# Altium PCB ADCBoard.PcbDoc (part 2 of 2)
Units mm, origin at the board's own origin, x right, y up, seen from the top; angles counter-clockwise.
Board outline 160 x 100 mm, 2 copper layers (Top Layer, Bottom Layer); 387 components, 428 nets, 1579 pads, 0 vias.
Unrouted connection lines stored in the file: 1110.
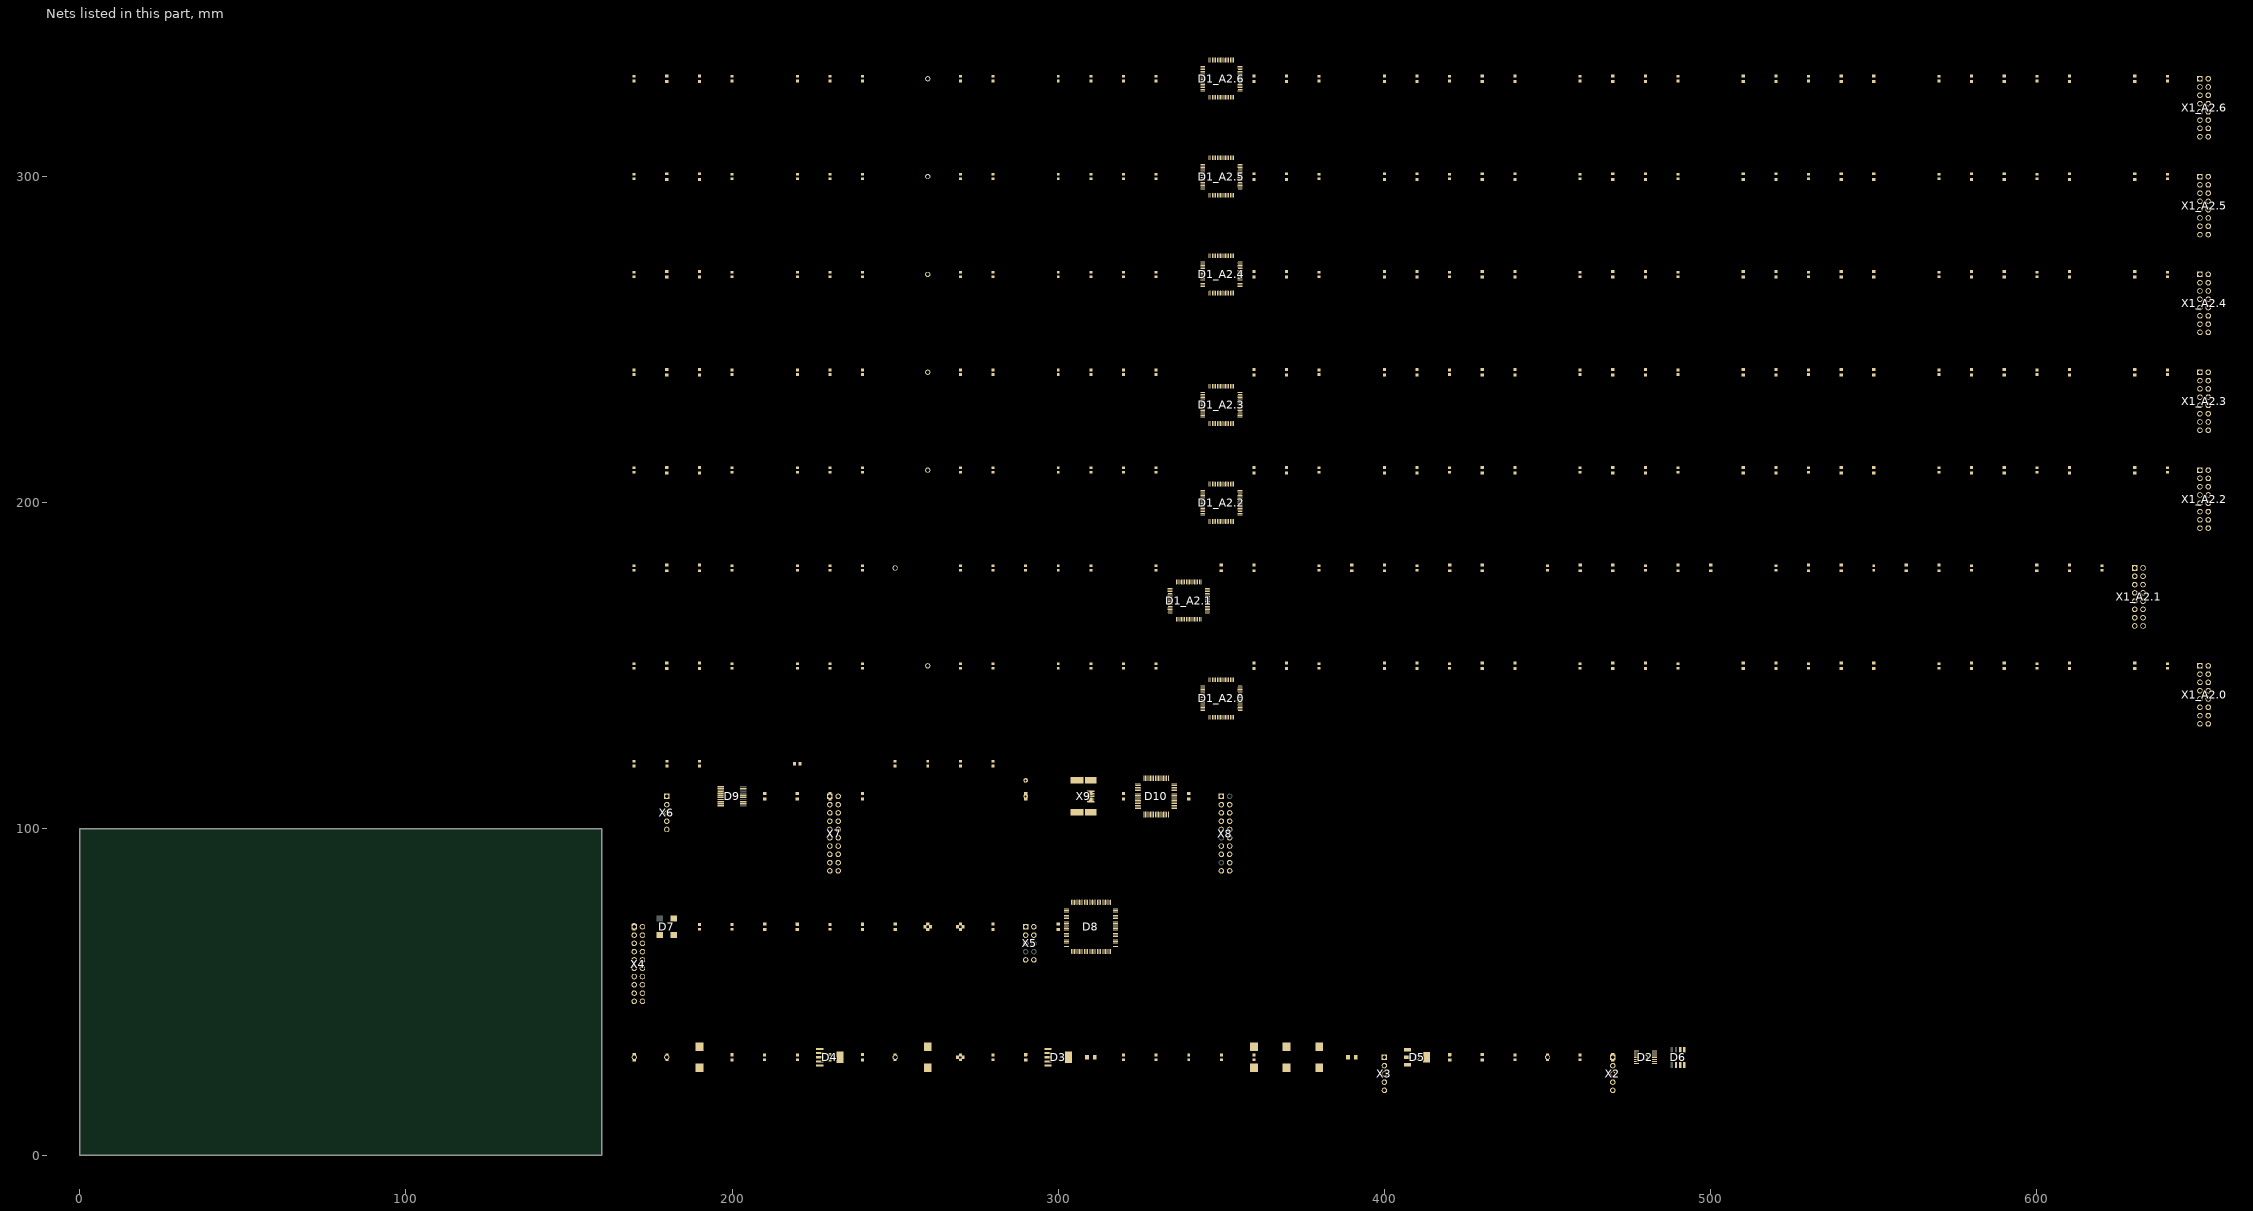
[diagram p2: the nets of this part, all layers, seen from the top]

## Part data
C1_A2.0 C1_A2.1 C1_A2.2 C1_A2.3 C1_A2.4 C1_A2.5 C1_A2.6 C2_A2.0 C2_A2.1 C2_A2.2 C2_A2.3 C2_A2.4 C2_A2.5 C2_A2.6 C3_A2.0 C3_A2.1 C3_A2.2 C3_A2.3 C3_A2.4 C3_A2.5 C3_A2.6 C4_A2.0 C4_A2.1 C4_A2.2 C4_A2.3 C4_A2.4 C4_A2.5 C4_A2.6 C5_A2.0 C5_A2.1 C5_A2.2 C5_A2.3 C5_A2.4 C5_A2.5 C5_A2.6 C6_A2.0 C6_A2.1 C6_A2.2 C6_A2.3 C6_A2.4 C6_A2.5 C6_A2.6 C7_A2.0 C7_A2.1 C7_A2.2 C7_A2.3 C7_A2.4 C7_A2.5 C7_A2.6 C8_A2.0 C8_A2.1 C8_A2.2 C8_A2.3 C8_A2.4 C8_A2.5 C8_A2.6 C9_A2.0 C9_A2.1 C9_A2.2 C9_A2.3 C9_A2.4 C9_A2.5 C9_A2.6 C10_A2.0 C10_A2.1 C10_A2.2 C10_A2.3 C10_A2.4 C10_A2.5 C10_A2.6 C11_A2.0 C11_A2.1 C11_A2.2 C11_A2.3 C11_A2.4 C11_A2.5 C11_A2.6 C12_A2.0 C12_A2.1 C12_A2.2 C12_A2.3 C12_A2.4 C12_A2.5 C12_A2.6 C13_A2.0 C13_A2.1 C13_A2.2 C13_A2.3 C13_A2.4 C13_A2.5 C13_A2.6 C14_A2.0 C14_A2.1 C14_A2.2 C14_A2.3 C14_A2.4 C14_A2.5 C14_A2.6 C15_A2.0 C15_A2.1 C15_A2.2 C15_A2.3 C15_A2.4 C15_A2.5 C15_A2.6 C16_A2.0 C16_A2.1 C16_A2.2 C16_A2.3 C16_A2.4 C16_A2.5 C16_A2.6 C17_A2.0 C17_A2.1 C17_A2.2 C17_A2.3 C17_A2.4 C17_A2.5 C17_A2.6 C18_A2.0 C18_A2.1 C18_A2.2 C18_A2.3 C18_A2.4 C18_A2.5 C18_A2.6 C19_A2.0 C19_A2.1 C19_A2.2 C19_A2.3 C19_A2.4 C19_A2.5 C19_A2.6 C23 C24 C25 C26 C27 C28 C29 C30 C31 C32 C33 C34 C35 C36 C38 C39 C42 C43 C44 C45 C46 C47 C48 C49 C50 C51 C52 C53 C54 C55 C56 C57 C58 C59 C60 C61 C62 C63 C64 C65 C66 C67 C68 C69: library part CC0603, "±10%, X7R, 0603"
C20 C21 C22 C37 C40 C41: library part "CAP TANTAL CASE E"
D1_A2.0 D1_A2.1 D1_A2.2 D1_A2.3 D1_A2.4 D1_A2.5 D1_A2.6: "AD7607BSTZ ADC Simultan"
D2: "SN74LV4T125PWR voltage level converter"
D5: "5V LDO"
D8: "MAX V 1.8V CPLD, 74 IOs, 570 Logic Elements, 100-Pin TQFP, Industrial Temperature, Speed Grade 5"
D9: "RS232 driver"
D10: "STM32F103RF LQFP64"
FB1 FB2 FB3: library part BLM21
Q1: "Ceramic quarz"
R1_A2.0 R1_A2.1 R1_A2.2 R1_A2.3 R1_A2.4 R1_A2.5 R1_A2.6 R2_A2.0 R2_A2.1 R2_A2.2 R2_A2.3 R2_A2.4 R2_A2.5 R2_A2.6 R3_A2.0 R3_A2.1 R3_A2.2 R3_A2.3 R3_A2.4 R3_A2.5 R3_A2.6 R4_A2.0 R4_A2.1 R4_A2.2 R4_A2.3 R4_A2.4 R4_A2.5 R4_A2.6 R5_A2.0 R5_A2.1 R5_A2.2 R5_A2.3 R5_A2.4 R5_A2.5 R5_A2.6 R6_A2.0 R6_A2.1 R6_A2.2 R6_A2.3 R6_A2.4 R6_A2.5 R6_A2.6 R7_A2.0 R7_A2.1 R7_A2.2 R7_A2.3 R7_A2.4 R7_A2.5 R7_A2.6 R8_A2.0 R8_A2.1 R8_A2.2 R8_A2.3 R8_A2.4 R8_A2.5 R8_A2.6 R9_A2.0 R9_A2.1 R9_A2.2 R9_A2.3 R9_A2.4 R9_A2.5 R9_A2.6 R10_A2.0 R10_A2.1 R10_A2.2 R10_A2.3 R10_A2.4 R10_A2.5 R10_A2.6 R11_A2.0 R11_A2.1 R11_A2.2 R11_A2.3 R11_A2.4 R11_A2.5 R11_A2.6 R12_A2.0 R12_A2.1 R12_A2.2 R12_A2.3 R12_A2.4 R12_A2.5 R12_A2.6 R13_A2.0 R13_A2.1 R13_A2.2 R13_A2.3 R13_A2.4 R13_A2.5 R13_A2.6 R14_A2.0 R14_A2.1 R14_A2.2 R14_A2.3 R14_A2.4 R14_A2.5 R14_A2.6 R15_A2.0 R15_A2.1 R15_A2.2 R15_A2.3 R15_A2.4 R15_A2.5 R15_A2.6 R16_A2.0 R16_A2.1 R16_A2.2 R16_A2.3 R16_A2.4 R16_A2.5 R16_A2.6 R17_A2.0 R17_A2.1 R17_A2.2 R17_A2.3 R17_A2.4 R17_A2.5 R17_A2.6 R18_A2.0 R18_A2.1 R18_A2.2 R18_A2.3 R18_A2.4 R18_A2.5 R18_A2.6 R19 R20 R21 R22 R23 R24 R25 R26 R27 R28 R29 R30 R31 R32 R33 R34 R35 R36 R37 R38 R39 R40 R41 R42 R43 R44: library part RES0603, "±5%, 0603"
X1_A2.0 X1_A2.1 X1_A2.2 X1_A2.3 X1_A2.4 X1_A2.5 X1_A2.6: library part ADCIN, "ADC connector"
X2: library part SYNCIN
X3: library part PWRIN
X4 X7: library part ADCOUT, "ADCOUT connector"
X5: library part BYTEBLASTER
X6: library part RS232
X8: library part JTAG
X9: library part USB-MINI-B

## Nets (pads, with @x,y where several pads share a name; then routed paths per layer and width w, separated by ;. In a path a pad name is that pad's centre, name@x,y a point inside that pad or via, vN(x,y) a via of type N, cw(c..) or ccw(c..) an arc to the next point about the centre after c; other vN are vias at no path point)
+1.8V: C21.1 C25.1 C30.1 C33.2 C50.2 C52.2 C54.2 C56.2 D3.4 D8.13 D8.39 D8.63 D8.88 R21.2 TP2.1
+3.3V: C10_A2.0.2 C10_A2.1.2 C10_A2.2.2 C10_A2.3.2 C10_A2.4.2 C10_A2.5.2 C10_A2.6.2 C22.1 C27.1 C28.2 C32.1 C34.2 C49.2 C51.2 C53.2 C55.2 C57.2 C63.2 C64.2 C66.2 C68.2 C69.2 D1_A2.0.23 D1_A2.1.23 D1_A2.2.23 D1_A2.3.23 D1_A2.4.23 D1_A2.5.23 D1_A2.6.23 D2.14 D4.4 D7.4 D8.9 D8.31 D8.45 D8.59 D8.80 D8.94 D9.19 D10.1 D10.13 D10.19 D10.32 D10.48 D10.64 R10_A2.0.1 R10_A2.1.1 R10_A2.2.1 R10_A2.3.1 R10_A2.4.1 R10_A2.5.1 R10_A2.6.1 R24.2 R31.2 R35.2 R36.2 R39.2 R41.1 R42.2 TP3.1 X4.19 X5.4 X7.19 X8.1
+5V: C24.2 C26.2 C29.2 C31.2 C38.2 C39.2 C40.1 D3.2 D4.2 D5.3 FB2.1 R20.2 R23.2 X3.3 X8.19
+5VA: C1_A2.0.2 C1_A2.1.2 C1_A2.2.2 C1_A2.3.2 C1_A2.4.2 C1_A2.5.2 C1_A2.6.2 C11_A2.0.2 C11_A2.1.2 C11_A2.2.2 C11_A2.3.2 C11_A2.4.2 C11_A2.5.2 C11_A2.6.2 C18_A2.0.1 C18_A2.1.1 C18_A2.2.1 C18_A2.3.1 C18_A2.4.1 C18_A2.5.1 C18_A2.6.1 C19_A2.0.1 C19_A2.1.1 C19_A2.2.1 C19_A2.3.1 C19_A2.4.1 C19_A2.5.1 C19_A2.6.1 C41.1 C42.2 C43.2 C44.2 C45.2 C46.2 D1_A2.0.1 D1_A2.0.37 D1_A2.0.38 D1_A2.0.48 D1_A2.1.1 D1_A2.1.37 D1_A2.1.38 D1_A2.1.48 D1_A2.2.1 D1_A2.2.37 D1_A2.2.38 D1_A2.2.48 D1_A2.3.1 D1_A2.3.37 D1_A2.3.38 D1_A2.3.48 D1_A2.4.1 D1_A2.4.37 D1_A2.4.38 D1_A2.4.48 D1_A2.5.1 D1_A2.5.37 D1_A2.5.38 D1_A2.5.48 D1_A2.6.1 D1_A2.6.37 D1_A2.6.38 D1_A2.6.48 D6.2 FB2.2
BOOT0: D10.60 R39.1 R40.2
BUSY0: D1_A2.0.14 D8.83
BUSY1: D1_A2.1.14 D8.84
BUSY2: D1_A2.2.14 D8.85
BUSY3: D1_A2.3.14 D8.86
BUSY4: D1_A2.4.14 D8.87
BUSY5: D1_A2.5.14 D8.89
BUSY6: D1_A2.6.14 D8.91
CLK: D2.8 D8.33 X4.11
CONVSTA: D1_A2.0.10 D1_A2.1.10 D1_A2.2.10 D1_A2.3.10 D1_A2.4.10 D1_A2.5.10 D1_A2.6.10 D8.36 R30.2
CONVSTA_A2.0: D1_A2.0.9 D1_A2.1.9 D1_A2.2.9 D1_A2.3.9 D1_A2.4.9 D1_A2.5.9 D1_A2.6.9 D8.38 R30.1
CPLD_IO0: D8.18 X4.2
CPLD_IO1: D8.19 X4.3
CPLD_IO2: D8.20 X4.4
CPLD_IO3: D8.21 X4.5
CPLD_IO4: D8.26 X4.6
CPLD_IO5: D8.27 D10.21 X4.7
CPLD_IO6: D8.28 D10.22 X4.8
CPLD_IO7: D8.29 D10.23 X4.9
CPLD_IO8: D8.12 X4.10
CPLD_IO9: D8.48 X4.18
CPLDCLK: D8.14 X4.1
CS0: D1_A2.0.13 D8.74
CS1: D1_A2.1.13 D8.75
CS2: D1_A2.2.13 D8.76
CS3: D1_A2.3.13 D8.77
CS4: D1_A2.4.13 D8.78
CS5: D1_A2.5.13 D8.81
CS6: D1_A2.6.13 D8.82
DATA0: D1_A2.0.16 D1_A2.1.16 D1_A2.2.16 D1_A2.3.16 D1_A2.4.16 D1_A2.5.16 D1_A2.6.16 D8.52
DATA1: D1_A2.0.17 D1_A2.1.17 D1_A2.2.17 D1_A2.3.17 D1_A2.4.17 D1_A2.5.17 D1_A2.6.17 D8.53
DATA2: D1_A2.0.18 D1_A2.1.18 D1_A2.2.18 D1_A2.3.18 D1_A2.4.18 D1_A2.5.18 D1_A2.6.18 D8.54
DATA3: D1_A2.0.19 D1_A2.1.19 D1_A2.2.19 D1_A2.3.19 D1_A2.4.19 D1_A2.5.19 D1_A2.6.19 D8.55
DATA4: D1_A2.0.20 D1_A2.1.20 D1_A2.2.20 D1_A2.3.20 D1_A2.4.20 D1_A2.5.20 D1_A2.6.20 D8.56
DATA5: D1_A2.0.21 D1_A2.1.21 D1_A2.2.21 D1_A2.3.21 D1_A2.4.21 D1_A2.5.21 D1_A2.6.21 D8.57
DATA6: D1_A2.0.22 D1_A2.1.22 D1_A2.2.22 D1_A2.3.22 D1_A2.4.22 D1_A2.5.22 D1_A2.6.22 D8.58
DATA7: D1_A2.0.24 D1_A2.1.24 D1_A2.2.24 D1_A2.3.24 D1_A2.4.24 D1_A2.5.24 D1_A2.6.24 D8.61
DATA8: D1_A2.0.25 D1_A2.1.25 D1_A2.2.25 D1_A2.3.25 D1_A2.4.25 D1_A2.5.25 D1_A2.6.25 D8.66
DATA9: D1_A2.0.27 D1_A2.1.27 D1_A2.2.27 D1_A2.3.27 D1_A2.4.27 D1_A2.5.27 D1_A2.6.27 D8.67
DATA10: D1_A2.0.28 D1_A2.1.28 D1_A2.2.28 D1_A2.3.28 D1_A2.4.28 D1_A2.5.28 D1_A2.6.28 D8.68
DATA11: D1_A2.0.29 D1_A2.1.29 D1_A2.2.29 D1_A2.3.29 D1_A2.4.29 D1_A2.5.29 D1_A2.6.29 D8.69
DATA12: D1_A2.0.30 D1_A2.1.30 D1_A2.2.30 D1_A2.3.30 D1_A2.4.30 D1_A2.5.30 D1_A2.6.30 D8.70
DATA13: D1_A2.0.31 D1_A2.1.31 D1_A2.2.31 D1_A2.3.31 D1_A2.4.31 D1_A2.5.31 D1_A2.6.31 D8.71
DATA14: D1_A2.0.32 D1_A2.1.32 D1_A2.2.32 D1_A2.3.32 D1_A2.4.32 D1_A2.5.32 D1_A2.6.32 D8.72
DATA15: D1_A2.0.33 D1_A2.1.33 D1_A2.2.33 D1_A2.3.33 D1_A2.4.33 D1_A2.5.33 D1_A2.6.33 D8.73
FRAMECLK: D2.3 D8.35 X4.13
FRAMESTOP: D2.6 D8.34 X4.12
FRSTDATA0: D1_A2.0.15 D8.92
FRSTDATA1: D1_A2.1.15 D8.96
FRSTDATA2: D1_A2.2.15 D8.97
FRSTDATA3: D1_A2.3.15 D8.98
FRSTDATA4: D1_A2.4.15 D8.99
FRSTDATA5: D1_A2.5.15 D8.100
FRSTDATA6: D1_A2.6.15 D8.1
GENOSC: D7.3 D8.64 X4.15
GND: C20.2 C21.2 C22.2 C23.1 C24.1 C25.2 C26.1 C27.2 C28.1 C29.1 C30.2 C31.1 C32.2 C35.1 C36.1 C37.2 C38.1 C39.1 C40.2 C49.1 C50.1 C51.1 C52.1 C53.1 C54.1 C55.1 C56.1 C57.1 C58.1 C59.1 C60.2 C63.1 C64.1 C65.1 C66.1 C67.1 C68.1 C69.1 D2.7 D3.3 D3.6 D4.3 D4.6 D5.2 D5.4 D7.2 D8.8 D8.10 D8.11 D8.32 D8.37 D8.46 D8.60 D8.65 D8.79 D8.90 D8.93 D8.95 D10.12 D10.18 D10.31 D10.47 D10.63 FB3.1 R19.1 R22.2 R25.2 R28.1 R29.1 R32.2 R33.2 R34.1 R37.2 R38.2 R40.1 TP4.1 X2.5 X3.4 X3.5 X4.20 X5.2 X5.10 X6.5 X7.20 X8.4 X8.6 X8.8 X8.10 X8.12 X8.14 X8.16 X8.18 X8.20 X9.5 X9.6
GNDA: C1_A2.0.1 C1_A2.1.1 C1_A2.2.1 C1_A2.3.1 C1_A2.4.1 C1_A2.5.1 C1_A2.6.1 C10_A2.0.1 C10_A2.1.1 C10_A2.2.1 C10_A2.3.1 C10_A2.4.1 C10_A2.5.1 C10_A2.6.1 C11_A2.0.1 C11_A2.1.1 C11_A2.2.1 C11_A2.3.1 C11_A2.4.1 C11_A2.5.1 C11_A2.6.1 C12_A2.0.2 C12_A2.1.2 C12_A2.2.2 C12_A2.3.2 C12_A2.4.2 C12_A2.5.2 C12_A2.6.2 C13_A2.0.2 C13_A2.1.2 C13_A2.2.2 C13_A2.3.2 C13_A2.4.2 C13_A2.5.2 C13_A2.6.2 C14_A2.0.1 C14_A2.1.1 C14_A2.2.1 C14_A2.3.1 C14_A2.4.1 C14_A2.5.1 C14_A2.6.1 C15_A2.0.1 C15_A2.1.1 C15_A2.2.1 C15_A2.3.1 C15_A2.4.1 C15_A2.5.1 C15_A2.6.1 C16_A2.0.2 C16_A2.1.2 C16_A2.2.2 C16_A2.3.2 C16_A2.4.2 C16_A2.5.2 C16_A2.6.2 C17_A2.0.2 C17_A2.1.2 C17_A2.2.2 C17_A2.3.2 C17_A2.4.2 C17_A2.5.2 C17_A2.6.2 C18_A2.0.2 C18_A2.1.2 C18_A2.2.2 C18_A2.3.2 C18_A2.4.2 C18_A2.5.2 C18_A2.6.2 C19_A2.0.2 C19_A2.1.2 C19_A2.2.2 C19_A2.3.2 C19_A2.4.2 C19_A2.5.2 C19_A2.6.2 C41.2 C42.1 C43.1 C44.1 C45.1 C46.1 C47.1 C48.1 D1_A2.0.2 D1_A2.0.26 D1_A2.0.35 D1_A2.0.40 D1_A2.0.41 D1_A2.0.43 D1_A2.0.46 D1_A2.0.47 D1_A2.1.2 D1_A2.1.26 D1_A2.1.35 D1_A2.1.40 D1_A2.1.41 D1_A2.1.43 D1_A2.1.46 D1_A2.1.47 D1_A2.2.2 D1_A2.2.26 D1_A2.2.35 D1_A2.2.40 D1_A2.2.41 D1_A2.2.43 D1_A2.2.46 D1_A2.2.47 D1_A2.3.2 D1_A2.3.26 D1_A2.3.35 D1_A2.3.40 D1_A2.3.41 D1_A2.3.43 D1_A2.3.46 D1_A2.3.47 D1_A2.4.2 D1_A2.4.26 D1_A2.4.35 D1_A2.4.40 D1_A2.4.41 D1_A2.4.43 D1_A2.4.46 D1_A2.4.47 D1_A2.5.2 D1_A2.5.26 D1_A2.5.35 D1_A2.5.40 D1_A2.5.41 D1_A2.5.43 D1_A2.5.46 D1_A2.5.47 D1_A2.6.2 D1_A2.6.26 D1_A2.6.35 D1_A2.6.40 D1_A2.6.41 D1_A2.6.43 D1_A2.6.46 D1_A2.6.47 D6.4 FB3.2 R9_A2.0.1 R9_A2.1.1 R9_A2.2.1 R9_A2.3.1 R9_A2.4.1 R9_A2.5.1 R9_A2.6.1 R27.2 TP1_A2.0.1 TP1_A2.1.1 TP1_A2.2.1 TP1_A2.3.1 TP1_A2.4.1 TP1_A2.5.1 TP1_A2.6.1 TP7.1
GNDIN1_A2.0: R11_A2.0.1 X1_A2.0.2
GNDIN1_A2.1: R11_A2.1.1 X1_A2.1.2
GNDIN1_A2.2: R11_A2.2.1 X1_A2.2.2
GNDIN1_A2.3: R11_A2.3.1 X1_A2.3.2
GNDIN1_A2.4: R11_A2.4.1 X1_A2.4.2
GNDIN1_A2.5: R11_A2.5.1 X1_A2.5.2
GNDIN1_A2.6: R11_A2.6.1 X1_A2.6.2
GNDIN2_A2.0: R15_A2.0.1 X1_A2.0.4
GNDIN2_A2.1: R15_A2.1.1 X1_A2.1.4
GNDIN2_A2.2: R15_A2.2.1 X1_A2.2.4
GNDIN2_A2.3: R15_A2.3.1 X1_A2.3.4
GNDIN2_A2.4: R15_A2.4.1 X1_A2.4.4
GNDIN2_A2.5: R15_A2.5.1 X1_A2.5.4
GNDIN2_A2.6: R15_A2.6.1 X1_A2.6.4
GNDIN3_A2.0: R12_A2.0.1 X1_A2.0.6
GNDIN3_A2.1: R12_A2.1.1 X1_A2.1.6
GNDIN3_A2.2: R12_A2.2.1 X1_A2.2.6
GNDIN3_A2.3: R12_A2.3.1 X1_A2.3.6
GNDIN3_A2.4: R12_A2.4.1 X1_A2.4.6
GNDIN3_A2.5: R12_A2.5.1 X1_A2.5.6
GNDIN3_A2.6: R12_A2.6.1 X1_A2.6.6
GNDIN4_A2.0: R16_A2.0.1 X1_A2.0.8
GNDIN4_A2.1: R16_A2.1.1 X1_A2.1.8
GNDIN4_A2.2: R16_A2.2.1 X1_A2.2.8
GNDIN4_A2.3: R16_A2.3.1 X1_A2.3.8
GNDIN4_A2.4: R16_A2.4.1 X1_A2.4.8
GNDIN4_A2.5: R16_A2.5.1 X1_A2.5.8
GNDIN4_A2.6: R16_A2.6.1 X1_A2.6.8
GNDIN5_A2.0: R13_A2.0.1 X1_A2.0.10
GNDIN5_A2.1: R13_A2.1.1 X1_A2.1.10
GNDIN5_A2.2: R13_A2.2.1 X1_A2.2.10
GNDIN5_A2.3: R13_A2.3.1 X1_A2.3.10
GNDIN5_A2.4: R13_A2.4.1 X1_A2.4.10
GNDIN5_A2.5: R13_A2.5.1 X1_A2.5.10
GNDIN5_A2.6: R13_A2.6.1 X1_A2.6.10
GNDIN6_A2.0: R17_A2.0.1 X1_A2.0.12
GNDIN6_A2.1: R17_A2.1.1 X1_A2.1.12
GNDIN6_A2.2: R17_A2.2.1 X1_A2.2.12
GNDIN6_A2.3: R17_A2.3.1 X1_A2.3.12
GNDIN6_A2.4: R17_A2.4.1 X1_A2.4.12
GNDIN6_A2.5: R17_A2.5.1 X1_A2.5.12
GNDIN6_A2.6: R17_A2.6.1 X1_A2.6.12
GNDIN7_A2.0: R14_A2.0.1 X1_A2.0.14
GNDIN7_A2.1: R14_A2.1.1 X1_A2.1.14
GNDIN7_A2.2: R14_A2.2.1 X1_A2.2.14
GNDIN7_A2.3: R14_A2.3.1 X1_A2.3.14
GNDIN7_A2.4: R14_A2.4.1 X1_A2.4.14
GNDIN7_A2.5: R14_A2.5.1 X1_A2.5.14
GNDIN7_A2.6: R14_A2.6.1 X1_A2.6.14
GNDIN8_A2.0: R18_A2.0.1 X1_A2.0.16
GNDIN8_A2.1: R18_A2.1.1 X1_A2.1.16
GNDIN8_A2.2: R18_A2.2.1 X1_A2.2.16
GNDIN8_A2.3: R18_A2.3.1 X1_A2.3.16
GNDIN8_A2.4: R18_A2.4.1 X1_A2.4.16
GNDIN8_A2.5: R18_A2.5.1 X1_A2.5.16
GNDIN8_A2.6: R18_A2.6.1 X1_A2.6.16
IKK: D2.5 X2.2
IN1_A2.0: R5_A2.0.1 X1_A2.0.1
IN1_A2.1: R5_A2.1.1 X1_A2.1.1
IN1_A2.2: R5_A2.2.1 X1_A2.2.1
IN1_A2.3: R5_A2.3.1 X1_A2.3.1
IN1_A2.4: R5_A2.4.1 X1_A2.4.1
IN1_A2.5: R5_A2.5.1 X1_A2.5.1
IN1_A2.6: R5_A2.6.1 X1_A2.6.1
IN2_A2.0: R1_A2.0.1 X1_A2.0.3
IN2_A2.1: R1_A2.1.1 X1_A2.1.3
IN2_A2.2: R1_A2.2.1 X1_A2.2.3
IN2_A2.3: R1_A2.3.1 X1_A2.3.3
IN2_A2.4: R1_A2.4.1 X1_A2.4.3
IN2_A2.5: R1_A2.5.1 X1_A2.5.3
IN2_A2.6: R1_A2.6.1 X1_A2.6.3
IN3_A2.0: R6_A2.0.1 X1_A2.0.5
IN3_A2.1: R6_A2.1.1 X1_A2.1.5
IN3_A2.2: R6_A2.2.1 X1_A2.2.5
IN3_A2.3: R6_A2.3.1 X1_A2.3.5
IN3_A2.4: R6_A2.4.1 X1_A2.4.5
IN3_A2.5: R6_A2.5.1 X1_A2.5.5
IN3_A2.6: R6_A2.6.1 X1_A2.6.5
IN4_A2.0: R2_A2.0.1 X1_A2.0.7
IN4_A2.1: R2_A2.1.1 X1_A2.1.7
IN4_A2.2: R2_A2.2.1 X1_A2.2.7
IN4_A2.3: R2_A2.3.1 X1_A2.3.7
IN4_A2.4: R2_A2.4.1 X1_A2.4.7
IN4_A2.5: R2_A2.5.1 X1_A2.5.7
IN4_A2.6: R2_A2.6.1 X1_A2.6.7
IN5_A2.0: R7_A2.0.1 X1_A2.0.9
IN5_A2.1: R7_A2.1.1 X1_A2.1.9
IN5_A2.2: R7_A2.2.1 X1_A2.2.9
IN5_A2.3: R7_A2.3.1 X1_A2.3.9
IN5_A2.4: R7_A2.4.1 X1_A2.4.9
IN5_A2.5: R7_A2.5.1 X1_A2.5.9
IN5_A2.6: R7_A2.6.1 X1_A2.6.9
IN6_A2.0: R3_A2.0.1 X1_A2.0.11
IN6_A2.1: R3_A2.1.1 X1_A2.1.11
IN6_A2.2: R3_A2.2.1 X1_A2.2.11
IN6_A2.3: R3_A2.3.1 X1_A2.3.11
IN6_A2.4: R3_A2.4.1 X1_A2.4.11
IN6_A2.5: R3_A2.5.1 X1_A2.5.11
IN6_A2.6: R3_A2.6.1 X1_A2.6.11
IN7_A2.0: R8_A2.0.1 X1_A2.0.13
IN7_A2.1: R8_A2.1.1 X1_A2.1.13
IN7_A2.2: R8_A2.2.1 X1_A2.2.13
IN7_A2.3: R8_A2.3.1 X1_A2.3.13
IN7_A2.4: R8_A2.4.1 X1_A2.4.13
IN7_A2.5: R8_A2.5.1 X1_A2.5.13
IN7_A2.6: R8_A2.6.1 X1_A2.6.13
IN8_A2.0: R4_A2.0.1 X1_A2.0.15
IN8_A2.1: R4_A2.1.1 X1_A2.1.15
IN8_A2.2: R4_A2.2.1 X1_A2.2.15
IN8_A2.3: R4_A2.3.1 X1_A2.3.15
IN8_A2.4: R4_A2.4.1 X1_A2.4.15
IN8_A2.5: R4_A2.5.1 X1_A2.5.15
IN8_A2.6: R4_A2.6.1 X1_A2.6.15
INK: D2.2 X2.1
LED0: D8.40 VD1.1 X4.17
LED1: D8.41 VD2.1
NetC33_1: C33.1 D3.5 R21.1 R22.1
NetC34_1: C34.1 D4.5 R24.1 R25.1
NetC35_2: C35.2 C36.2 C37.1 D5.1 FB1.2
NetC59_2: C59.2 D9.3
NetC60_1: C60.1 D9.7
NetC61_1: C61.1 D9.4
NetC61_2: C61.2 D9.2
NetC62_1: C62.1 D9.6
NetC62_2: C62.2 D9.5
NetD3_1: D3.1 R20.1
NetD4_1: D4.1 R23.1
NetD6_3: D6.3 TP5.1
NetD6_5: D6.5 R26.1 R27.1
NetR32_1: R32.1 VD1.2
NetR33_1: R33.1 VD2.2
NetR37_1: R37.1 VD3.2
NetR38_1: R38.1 VD4.2
O\E\: D2.1 D2.4 D2.10 D2.13 D10.10 R19.2
OS0: D8.49
OS0_A2.0: D1_A2.0.3
OS0_A2.1: D1_A2.1.3
OS0_A2.2: D1_A2.2.3
OS0_A2.3: D1_A2.3.3
OS0_A2.4: D1_A2.4.3
OS0_A2.5: D1_A2.5.3
OS0_A2.6: D1_A2.6.3
OS1: D8.50
OS1_A2.0: D1_A2.0.4
OS1_A2.1: D1_A2.1.4
OS1_A2.2: D1_A2.2.4
OS1_A2.3: D1_A2.3.4
OS1_A2.4: D1_A2.4.4
OS1_A2.5: D1_A2.5.4
OS1_A2.6: D1_A2.6.4
OS2: D8.51
OS2_A2.0: D1_A2.0.5
OS2_A2.1: D1_A2.1.5
OS2_A2.2: D1_A2.2.5
OS2_A2.3: D1_A2.3.5
OS2_A2.4: D1_A2.4.5
OS2_A2.5: D1_A2.5.5
OS2_A2.6: D1_A2.6.5
P\A\R\/SER: D1_A2.0.6 D1_A2.1.6 D1_A2.2.6 D1_A2.3.6 D1_A2.4.6 D1_A2.5.6 D1_A2.6.6 D8.43 R28.2
PA8/U1_CK/TM1: D10.41
PA11/USBDM: D10.44 R44.2
PA12/USBDP: D10.45 R42.1 R43.2
PA13/JTMS: D10.46 X8.7
PA14/JTCK: D10.49 X8.9
PA15/JTDI: D10.50 X7.16 X8.5
PB3/JTDO: D10.55 X7.17 X8.13
PB4/JNTRST: D10.56 X7.18 X8.3
PB5/SMBA: D10.57 X7.15
PB6/I2C1_SCL: D10.58 X7.13
PB7/I2C1_SDA: D10.59 X7.14
PB12/SPI2_NSS/I2C2_SMBA: D8.6 D10.33
PB13/SPI2_SCK/U3CTS: D8.5 D10.34
PB14/SPI2_MISO/U3RTS: D8.4 D10.35
PB15/SPI2_MOSI: D8.3 D10.36
PC0/A10: D10.8 VD3.1
PC1/A11: D10.9 VD4.1
PC3/A13: D10.11
PC10: D9.1 D10.51 X7.11
PC11: D10.52 X7.12
PC12: D10.53
PC13/RTC: D10.2 X7.10
PD2/TM3_ETH: D10.54
PD8/USART3_TXR: D10.61 X7.3
PD9/USART3_RXR: D10.62 X7.4
R\D\/SCL_A2.0: D1_A2.0.12 D1_A2.1.12 D1_A2.2.12 D1_A2.3.12 D1_A2.4.12 D1_A2.5.12 D1_A2.6.12 D8.62
RANGE: D1_A2.0.8 D1_A2.1.8 D1_A2.2.8 D1_A2.3.8 D1_A2.4.8 D1_A2.5.8 D1_A2.6.8 D8.47 R29.2
REFCAP_A2.0: C12_A2.0.1 C16_A2.0.1 D1_A2.0.44 D1_A2.0.45
REFCAP_A2.1: C12_A2.1.1 C16_A2.1.1 D1_A2.1.44 D1_A2.1.45
REFCAP_A2.2: C12_A2.2.1 C16_A2.2.1 D1_A2.2.44 D1_A2.2.45
REFCAP_A2.3: C12_A2.3.1 C16_A2.3.1 D1_A2.3.44 D1_A2.3.45
REFCAP_A2.4: C12_A2.4.1 C16_A2.4.1 D1_A2.4.44 D1_A2.4.45
REFCAP_A2.5: C12_A2.5.1 C16_A2.5.1 D1_A2.5.44 D1_A2.5.45
REFCAP_A2.6: C12_A2.6.1 C16_A2.6.1 D1_A2.6.44 D1_A2.6.45
REFIN: C13_A2.0.1 C13_A2.1.1 C13_A2.2.1 C13_A2.3.1 C13_A2.4.1 C13_A2.5.1 C13_A2.6.1 C17_A2.0.1 C17_A2.1.1 C17_A2.2.1 C17_A2.3.1 C17_A2.4.1 C17_A2.5.1 C17_A2.6.1 C47.2 C48.2 D1_A2.0.42 D1_A2.1.42 D1_A2.2.42 D1_A2.3.42 D1_A2.4.42 D1_A2.5.42 D1_A2.6.42 D6.6 R26.2 TP6.1
REFSEL_A2.0: D1_A2.0.34 R9_A2.0.2 R10_A2.0.2
REFSEL_A2.1: D1_A2.1.34 R9_A2.1.2 R10_A2.1.2
REFSEL_A2.2: D1_A2.2.34 R9_A2.2.2 R10_A2.2.2
REFSEL_A2.3: D1_A2.3.34 R9_A2.3.2 R10_A2.3.2
REFSEL_A2.4: D1_A2.4.34 R9_A2.4.2 R10_A2.4.2
REFSEL_A2.5: D1_A2.5.34 R9_A2.5.2 R10_A2.5.2
REFSEL_A2.6: D1_A2.6.34 R9_A2.6.2 R10_A2.6.2
REGCAP1_A2.0: C14_A2.0.2 D1_A2.0.39
REGCAP1_A2.1: C14_A2.1.2 D1_A2.1.39
REGCAP1_A2.2: C14_A2.2.2 D1_A2.2.39
REGCAP1_A2.3: C14_A2.3.2 D1_A2.3.39
REGCAP1_A2.4: C14_A2.4.2 D1_A2.4.39
REGCAP1_A2.5: C14_A2.5.2 D1_A2.5.39
REGCAP1_A2.6: C14_A2.6.2 D1_A2.6.39
REGCAP2_A2.0: C15_A2.0.2 D1_A2.0.36
REGCAP2_A2.1: C15_A2.1.2 D1_A2.1.36
REGCAP2_A2.2: C15_A2.2.2 D1_A2.2.36
REGCAP2_A2.3: C15_A2.3.2 D1_A2.3.36
REGCAP2_A2.4: C15_A2.4.2 D1_A2.4.36
REGCAP2_A2.5: C15_A2.5.2 D1_A2.5.36
REGCAP2_A2.6: C15_A2.6.2 D1_A2.6.36
RESET: D1_A2.0.11 D1_A2.1.11 D1_A2.2.11 D1_A2.3.11 D1_A2.4.11 D1_A2.5.11 D1_A2.6.11 D8.42 X4.16
RS232_CTS: D9.9 X6.4
RS232_RTS: D9.8 X6.3
RS232_RX: D9.16 X6.2
RS232_TX: X6.1
S\T\B\Y\: D1_A2.0.7 D1_A2.1.7 D1_A2.2.7 D1_A2.3.7 D1_A2.4.7 D1_A2.5.7 D1_A2.6.7 D8.44 R31.1
STM_DONE: D8.16 D10.39
STM_NRESET: C58.2 D10.7 X8.15
STM_OCS32_IN: D10.3
STM_OCS32_OUT: D10.4
STM_OCS_IN: D10.5 Q1.2
STM_OCS_OUT: D10.6 Q1.1
STM_PB0/A/TM: D10.26
STM_PB1/A/TM: D10.27
STM_PB2/BOOT1: D10.28 R41.2
STM_PC4: D10.24
STM_PC5: D10.25
STM_PC6: D10.37
STM_PC7: D8.17 D10.38
STM_PC9: D8.2 D10.40
STM_U1_RX: D8.15 D10.43
STM_U1_TX: D8.7 D10.42
STM_U2_CK: D10.20 X7.9
STM_U2CTS: D9.10 D10.14 X7.7
STM_U2RTS: D9.12 D10.15 X7.8
STM_U2RX: D9.15 D10.17 X7.5
STM_U2TX: D9.13 D10.16 X7.6
STM_U3_RX: D10.30 X7.1
STM_U3_TX: D10.29 X7.2
TCK: D8.24 R34.2 X5.1
TDI: D8.23 R35.1 X5.9
TDO: D8.25 X5.3
TEST: D2.11 D8.30 X4.14
TESTIN: D2.12 X2.4
TI: D2.9 X2.3
TMS: D8.22 R36.1 X5.5
USB_N: C67.2 R44.1 X9.2
USB_P: C65.2 R43.1 X9.3
V1_A2.0: C6_A2.0.2 D1_A2.0.49 R5_A2.0.2
V1_A2.1: C6_A2.1.2 D1_A2.1.49 R5_A2.1.2
V1_A2.2: C6_A2.2.2 D1_A2.2.49 R5_A2.2.2
V1_A2.3: C6_A2.3.2 D1_A2.3.49 R5_A2.3.2
V1_A2.4: C6_A2.4.2 D1_A2.4.49 R5_A2.4.2
V1_A2.5: C6_A2.5.2 D1_A2.5.49 R5_A2.5.2
V1_A2.6: C6_A2.6.2 D1_A2.6.49 R5_A2.6.2
V1GND_A2.0: C6_A2.0.1 D1_A2.0.50 R11_A2.0.2
V1GND_A2.1: C6_A2.1.1 D1_A2.1.50 R11_A2.1.2
V1GND_A2.2: C6_A2.2.1 D1_A2.2.50 R11_A2.2.2
V1GND_A2.3: C6_A2.3.1 D1_A2.3.50 R11_A2.3.2
V1GND_A2.4: C6_A2.4.1 D1_A2.4.50 R11_A2.4.2
V1GND_A2.5: C6_A2.5.1 D1_A2.5.50 R11_A2.5.2
V1GND_A2.6: C6_A2.6.1 D1_A2.6.50 R11_A2.6.2
V2_A2.0: C2_A2.0.2 D1_A2.0.51 R1_A2.0.2
V2_A2.1: C2_A2.1.2 D1_A2.1.51 R1_A2.1.2
V2_A2.2: C2_A2.2.2 D1_A2.2.51 R1_A2.2.2
V2_A2.3: C2_A2.3.2 D1_A2.3.51 R1_A2.3.2
V2_A2.4: C2_A2.4.2 D1_A2.4.51 R1_A2.4.2
V2_A2.5: C2_A2.5.2 D1_A2.5.51 R1_A2.5.2
V2_A2.6: C2_A2.6.2 D1_A2.6.51 R1_A2.6.2
V2GND_A2.0: C2_A2.0.1 D1_A2.0.52 R15_A2.0.2
V2GND_A2.1: C2_A2.1.1 D1_A2.1.52 R15_A2.1.2
V2GND_A2.2: C2_A2.2.1 D1_A2.2.52 R15_A2.2.2
V2GND_A2.3: C2_A2.3.1 D1_A2.3.52 R15_A2.3.2
V2GND_A2.4: C2_A2.4.1 D1_A2.4.52 R15_A2.4.2
V2GND_A2.5: C2_A2.5.1 D1_A2.5.52 R15_A2.5.2
V2GND_A2.6: C2_A2.6.1 D1_A2.6.52 R15_A2.6.2
V3_A2.0: C7_A2.0.2 D1_A2.0.53 R6_A2.0.2
V3_A2.1: C7_A2.1.2 D1_A2.1.53 R6_A2.1.2
V3_A2.2: C7_A2.2.2 D1_A2.2.53 R6_A2.2.2
V3_A2.3: C7_A2.3.2 D1_A2.3.53 R6_A2.3.2
V3_A2.4: C7_A2.4.2 D1_A2.4.53 R6_A2.4.2
V3_A2.5: C7_A2.5.2 D1_A2.5.53 R6_A2.5.2
V3_A2.6: C7_A2.6.2 D1_A2.6.53 R6_A2.6.2
V3GND_A2.0: C7_A2.0.1 D1_A2.0.54 R12_A2.0.2
V3GND_A2.1: C7_A2.1.1 D1_A2.1.54 R12_A2.1.2
V3GND_A2.2: C7_A2.2.1 D1_A2.2.54 R12_A2.2.2
V3GND_A2.3: C7_A2.3.1 D1_A2.3.54 R12_A2.3.2
V3GND_A2.4: C7_A2.4.1 D1_A2.4.54 R12_A2.4.2
V3GND_A2.5: C7_A2.5.1 D1_A2.5.54 R12_A2.5.2
V3GND_A2.6: C7_A2.6.1 D1_A2.6.54 R12_A2.6.2
V4_A2.0: C3_A2.0.2 D1_A2.0.55 R2_A2.0.2
V4_A2.1: C3_A2.1.2 D1_A2.1.55 R2_A2.1.2
V4_A2.2: C3_A2.2.2 D1_A2.2.55 R2_A2.2.2
V4_A2.3: C3_A2.3.2 D1_A2.3.55 R2_A2.3.2
V4_A2.4: C3_A2.4.2 D1_A2.4.55 R2_A2.4.2
V4_A2.5: C3_A2.5.2 D1_A2.5.55 R2_A2.5.2
V4_A2.6: C3_A2.6.2 D1_A2.6.55 R2_A2.6.2
V4GND_A2.0: C3_A2.0.1 D1_A2.0.56 R16_A2.0.2
V4GND_A2.1: C3_A2.1.1 D1_A2.1.56 R16_A2.1.2
V4GND_A2.2: C3_A2.2.1 D1_A2.2.56 R16_A2.2.2
V4GND_A2.3: C3_A2.3.1 D1_A2.3.56 R16_A2.3.2
V4GND_A2.4: C3_A2.4.1 D1_A2.4.56 R16_A2.4.2
V4GND_A2.5: C3_A2.5.1 D1_A2.5.56 R16_A2.5.2
V4GND_A2.6: C3_A2.6.1 D1_A2.6.56 R16_A2.6.2
V5_A2.0: C8_A2.0.2 D1_A2.0.57 R7_A2.0.2
V5_A2.1: C8_A2.1.2 D1_A2.1.57 R7_A2.1.2
V5_A2.2: C8_A2.2.2 D1_A2.2.57 R7_A2.2.2
V5_A2.3: C8_A2.3.2 D1_A2.3.57 R7_A2.3.2
V5_A2.4: C8_A2.4.2 D1_A2.4.57 R7_A2.4.2
V5_A2.5: C8_A2.5.2 D1_A2.5.57 R7_A2.5.2
V5_A2.6: C8_A2.6.2 D1_A2.6.57 R7_A2.6.2
V5GND_A2.0: C8_A2.0.1 D1_A2.0.58 R13_A2.0.2
V5GND_A2.1: C8_A2.1.1 D1_A2.1.58 R13_A2.1.2
V5GND_A2.2: C8_A2.2.1 D1_A2.2.58 R13_A2.2.2
V5GND_A2.3: C8_A2.3.1 D1_A2.3.58 R13_A2.3.2
V5GND_A2.4: C8_A2.4.1 D1_A2.4.58 R13_A2.4.2
V5GND_A2.5: C8_A2.5.1 D1_A2.5.58 R13_A2.5.2
V5GND_A2.6: C8_A2.6.1 D1_A2.6.58 R13_A2.6.2
V6_A2.0: C4_A2.0.2 D1_A2.0.59 R3_A2.0.2
V6_A2.1: C4_A2.1.2 D1_A2.1.59 R3_A2.1.2
V6_A2.2: C4_A2.2.2 D1_A2.2.59 R3_A2.2.2
V6_A2.3: C4_A2.3.2 D1_A2.3.59 R3_A2.3.2
V6_A2.4: C4_A2.4.2 D1_A2.4.59 R3_A2.4.2
V6_A2.5: C4_A2.5.2 D1_A2.5.59 R3_A2.5.2
V6_A2.6: C4_A2.6.2 D1_A2.6.59 R3_A2.6.2
V6GND_A2.0: C4_A2.0.1 D1_A2.0.60 R17_A2.0.2
V6GND_A2.1: C4_A2.1.1 D1_A2.1.60 R17_A2.1.2
V6GND_A2.2: C4_A2.2.1 D1_A2.2.60 R17_A2.2.2
V6GND_A2.3: C4_A2.3.1 D1_A2.3.60 R17_A2.3.2
V6GND_A2.4: C4_A2.4.1 D1_A2.4.60 R17_A2.4.2
V6GND_A2.5: C4_A2.5.1 D1_A2.5.60 R17_A2.5.2
V6GND_A2.6: C4_A2.6.1 D1_A2.6.60 R17_A2.6.2
V7_A2.0: C9_A2.0.2 D1_A2.0.61 R8_A2.0.2
V7_A2.1: C9_A2.1.2 D1_A2.1.61 R8_A2.1.2
V7_A2.2: C9_A2.2.2 D1_A2.2.61 R8_A2.2.2
V7_A2.3: C9_A2.3.2 D1_A2.3.61 R8_A2.3.2
V7_A2.4: C9_A2.4.2 D1_A2.4.61 R8_A2.4.2
V7_A2.5: C9_A2.5.2 D1_A2.5.61 R8_A2.5.2
V7_A2.6: C9_A2.6.2 D1_A2.6.61 R8_A2.6.2
V7GND_A2.0: C9_A2.0.1 D1_A2.0.62 R14_A2.0.2
V7GND_A2.1: C9_A2.1.1 D1_A2.1.62 R14_A2.1.2
V7GND_A2.2: C9_A2.2.1 D1_A2.2.62 R14_A2.2.2
V7GND_A2.3: C9_A2.3.1 D1_A2.3.62 R14_A2.3.2
V7GND_A2.4: C9_A2.4.1 D1_A2.4.62 R14_A2.4.2
V7GND_A2.5: C9_A2.5.1 D1_A2.5.62 R14_A2.5.2
V7GND_A2.6: C9_A2.6.1 D1_A2.6.62 R14_A2.6.2
V8_A2.0: C5_A2.0.2 D1_A2.0.63 R4_A2.0.2
V8_A2.1: C5_A2.1.2 D1_A2.1.63 R4_A2.1.2
V8_A2.2: C5_A2.2.2 D1_A2.2.63 R4_A2.2.2
V8_A2.3: C5_A2.3.2 D1_A2.3.63 R4_A2.3.2
V8_A2.4: C5_A2.4.2 D1_A2.4.63 R4_A2.4.2
V8_A2.5: C5_A2.5.2 D1_A2.5.63 R4_A2.5.2
V8_A2.6: C5_A2.6.2 D1_A2.6.63 R4_A2.6.2
V8GND_A2.0: C5_A2.0.1 D1_A2.0.64 R18_A2.0.2
V8GND_A2.1: C5_A2.1.1 D1_A2.1.64 R18_A2.1.2
V8GND_A2.2: C5_A2.2.1 D1_A2.2.64 R18_A2.2.2
V8GND_A2.3: C5_A2.3.1 D1_A2.3.64 R18_A2.3.2
V8GND_A2.4: C5_A2.4.1 D1_A2.4.64 R18_A2.4.2
V8GND_A2.5: C5_A2.5.1 D1_A2.5.64 R18_A2.5.2
V8GND_A2.6: C5_A2.6.1 D1_A2.6.64 R18_A2.6.2
V_USB: X9.1
VIN: C20.1 C23.2 FB1.1 X3.1 X3.2
pads on no net: D6.1 D6.7 D6.8 D7.1 D9.11 D9.14 D9.17 D9.18 D9.20 X5.6 X5.7 X5.8 X8.2 X8.11 X8.17 X9.4